# EAGLE board PCBwGND (EAGLE 9.2.0)
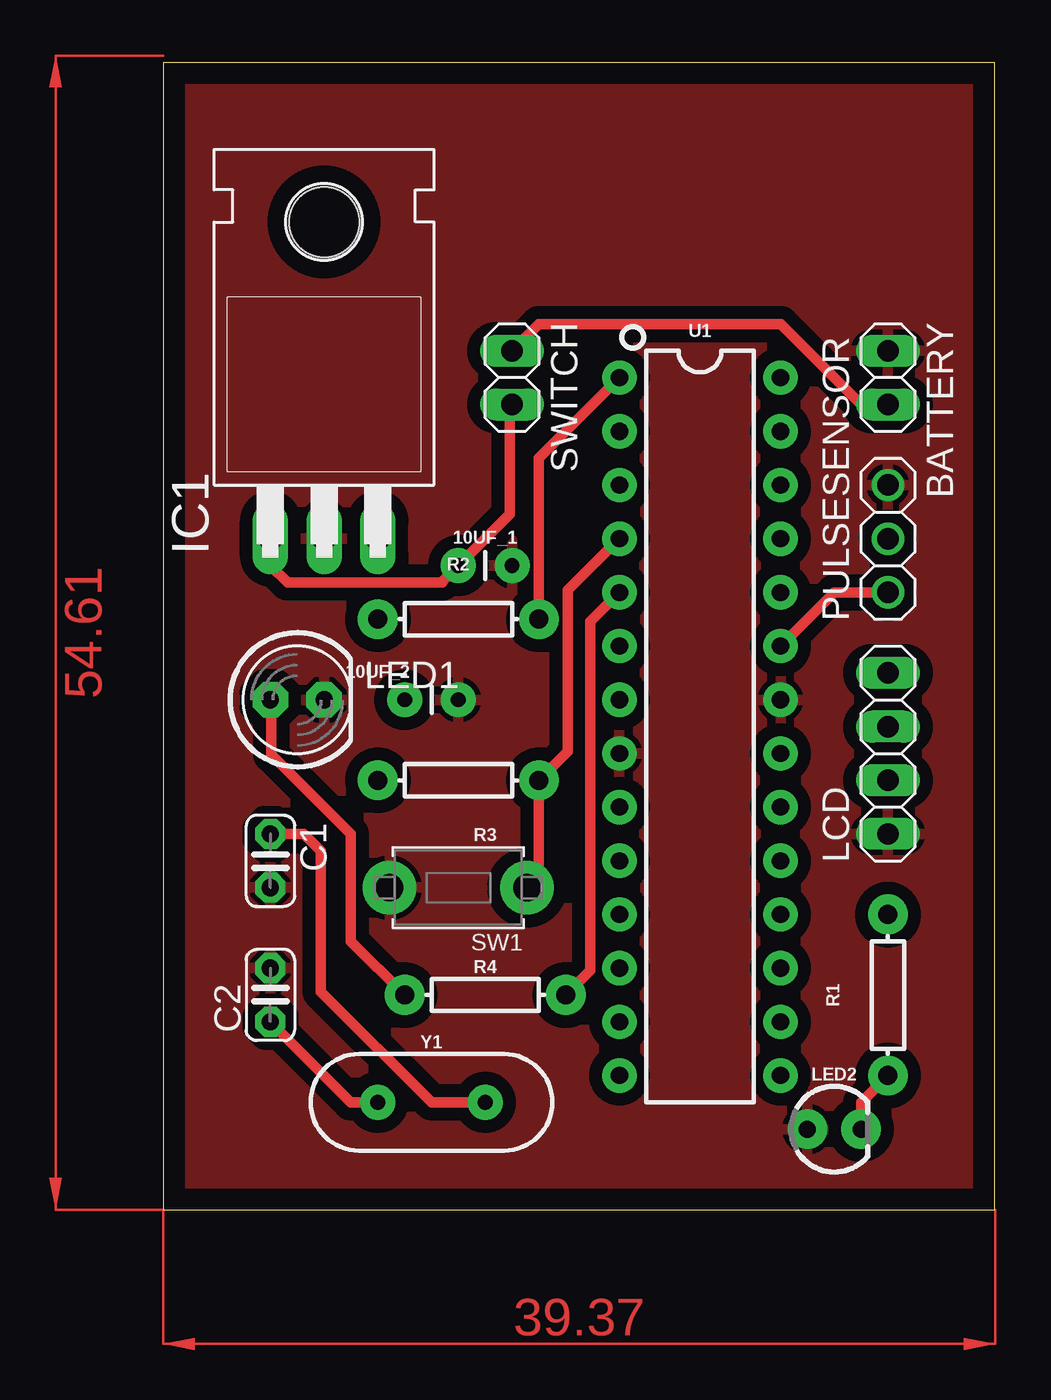
[diagram p0: board, top side]
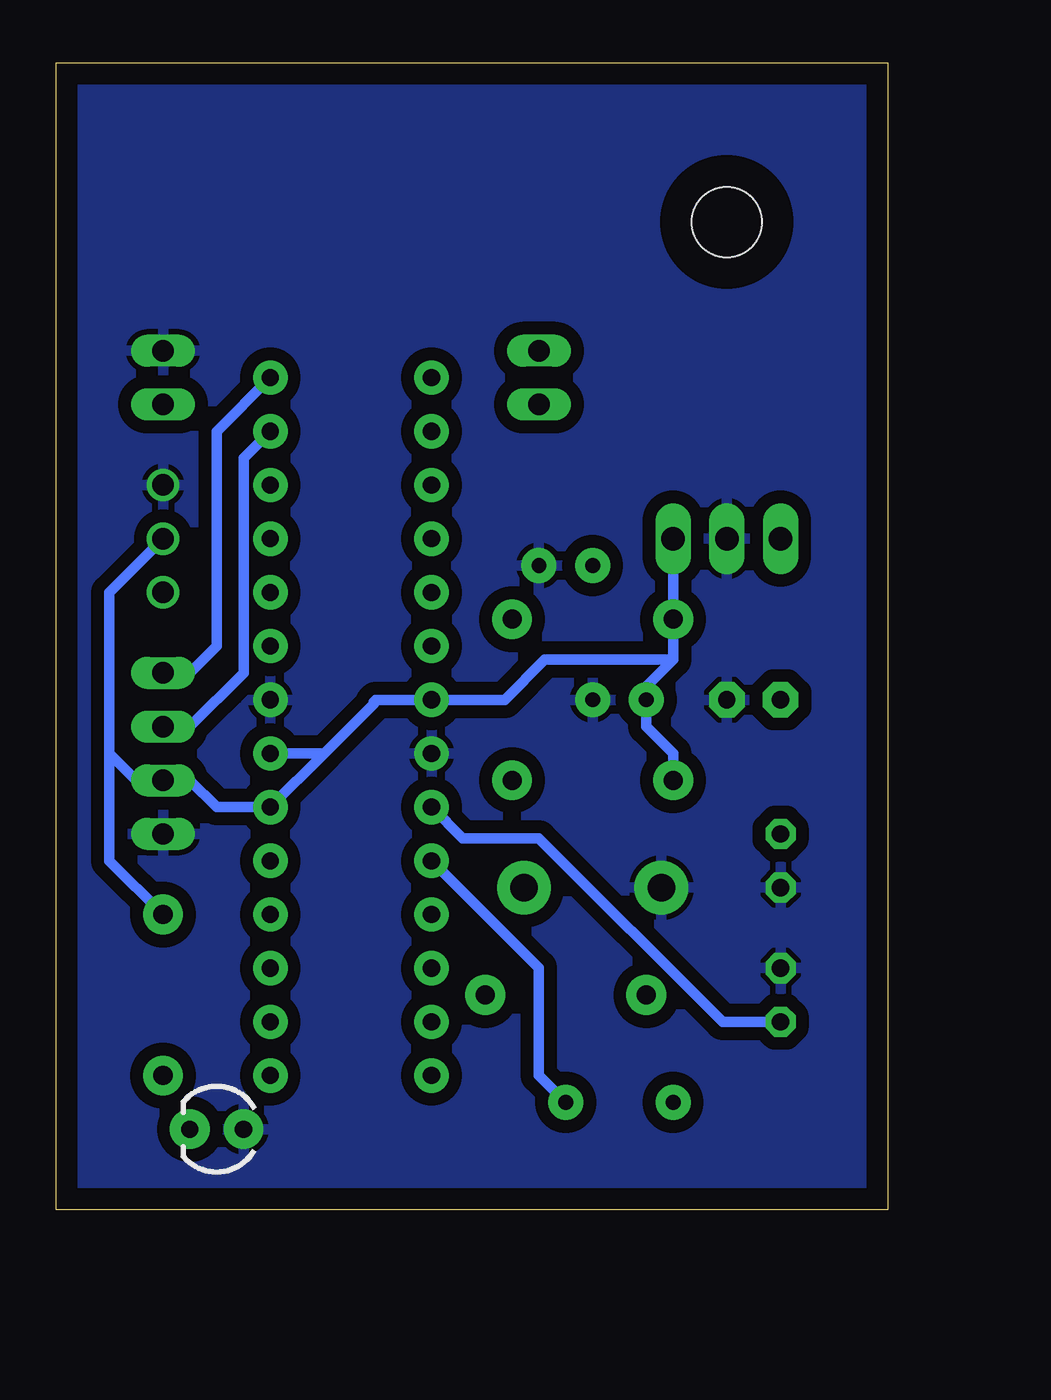
[diagram p1: board, bottom side, seen from below]

Size 39.35 x 54.28 mm. Coordinates in mm from the lower left corner, seen from the top.
Outline: 0,0 39.35,0 39.35,54.28 0,54.28 0,0
Copper layers (1*16): Top 0.035mm / dielectric 1.5mm / Bottom 0.035mm
Design rules "default": minimum track width 6mil, minimum drill 0.35mm, track to track 6mil, track to pad 6mil, pad to pad 6mil, via to via 6mil, smd to smd 6mil, copper to edge 40mil, drill to drill 6mil, minimum pad ring 10mil, minimum via ring 8mil, stop-mask expansion 4mil, vias tented up to drill 0mil, thermal gap 10mil

## Footprints (pad centres in the part's own frame; a part is rotated, then mirrored left to right if it is on the bottom)
CAP-PTH-2.54 = drill 0.7 pad 1.651: 1 -1.27,0; 2 1.27,0
1X02 = drill 1.016 long: 1 -1.27,0; 2 1.27,0
C025-024X044 = drill 0.813 pad 1.422 octagon: 1 -1.27,0; 2 1.27,0
TO220H = drill 1.118 long: 1 -2.54,-10.16; 2 0,-10.16; 3 2.54,-10.16 | hole 3.302: 0,4.826
1X04 = drill 1.016 long: 1 -3.81,0; 2 -1.27,0; 3 1.27,0; 4 3.81,0
LED5MM = drill 0.813 pad 1.676 octagon: A -1.27,0; K 1.27,0
LED_3MM = drill 0.813 pad 1.88: A -1.27,0; K 1.27,0
1X03 = drill 1.016: 1 -2.54,0; 2 0,0; 3 2.54,0
AXIAL-0.3 = drill 0.9 pad 1.88: P$1 -3.81,0; P$2 3.81,0
TACT_PANA-EVQ = drill 1.3 pad 2.54: P$1 -3.25,0; P$2 3.25,0
DIP28 = drill 0.813 pad 1.626: 1 -16.51,-3.81; 2 -13.97,-3.81; 3 -11.43,-3.81; 4 -8.89,-3.81; 5 -6.35,-3.81; 6 -3.81,-3.81; 7 -1.27,-3.81; 8 1.27,-3.81; 9 3.81,-3.81; 10 6.35,-3.81; 11 8.89,-3.81; 12 11.43,-3.81; 13 13.97,-3.81; 14 16.51,-3.81; 15 16.51,3.81; 16 13.97,3.81; 17 11.43,3.81; 18 8.89,3.81; 19 6.35,3.81; 20 3.81,3.81; 21 1.27,3.81; 22 -1.27,3.81; 23 -3.81,3.81; 24 -6.35,3.81; 25 -8.89,3.81; 26 -11.43,3.81; 27 -13.97,3.81; 28 -16.51,3.81
HC49US = drill 0.7 pad 1.651: 1 -2.54,0; 2 2.54,0

## Placement (x,y rotation side)
10UF_1  10uF  [CAP-PTH-2.54]  15.24,30.48 0 top
10UF_2  10uF  [CAP-PTH-2.54]  12.7,24.13 0 top
BATTERY  [1X02]  34.29,39.37 270 top
C1  22pF  [C025-024X044]  5.08,16.51 270 top
C2  22pF  [C025-024X044]  5.08,10.16 90 top
IC1  7805T  [TO220H]  7.62,41.91 0 top
LCD  [1X04]  34.29,21.59 90 top
LED1  [LED5MM]  6.35,24.13 0 top
LED2  [LED_3MM]  31.75,3.81 0 top
PULSESENSOR  [1X03]  34.29,31.75 90 top
R1  220  [AXIAL-0.3]  34.29,10.16 90 top
R2  10k  [AXIAL-0.3]  13.97,27.94 0 top
R3  10k  [AXIAL-0.3]  13.97,20.32 180 top
R4  150  [AXIAL-0.3]  15.24,10.16 0 top
SW1  [TACT_PANA-EVQ]  13.97,15.24 180 top
SWITCH  [1X02]  16.51,39.37 270 top
U1  328P  [DIP28]  25.4,22.86 270 top
Y1  16MHz  [HC49US]  12.7,5.08 0 top

## Library data of the parts
10UF_1 10UF_2 = SparkFun-Capacitors; PROD_ID: CAP-09128
BATTERY LCD SWITCH = pinhead
C1 C2 IC1 LED1 PULSESENSOR SW1 = adafruit
LED2 = SparkFun-LED; PROD_ID: DIO-08794
R1-R4 = SparkFun-Resistors; PROD_ID: RES-09435
U1 = SparkFun-IC-Microcontroller; PROD_ID: IC-09136
Y1 = SparkFun-Clocks; PROD_ID: XTAL-08181; SF_ID: COM-00536

## Nets
GND: 10UF_1.2 10UF_2.2 BATTERY.1 C1.2 C2.2 IC1.2 LCD.1 LED1.K LED2.A PULSESENSOR.3 SW1.P$2 U1.8 U1.22
N$1: BATTERY.2 SWITCH.1
N$3: LED1.A R4.P$1
N$4: LED2.K R1.P$1
PC0/ADC0: PULSESENSOR.1 U1.23
PD2: R4.P$2 U1.5
PD3: R3.P$1 SW1.P$1 U1.4
RESET: R2.P$2 U1.1
SCL: LCD.4 U1.28
SDA: LCD.3 U1.27
VCC: 10UF_2.1 IC1.3 LCD.2 PULSESENSOR.2 R1.P$2 R2.P$1 R3.P$2 U1.7 U1.20 U1.21
VIN: 10UF_1.1 IC1.1 SWITCH.2
XTAL1: C2.1 U1.9 Y1.1
XTAL2: C1.1 U1.10 Y1.2

## Tracks (layer width: path | path; a pad name or v marks a point on that pad's centre or on a via)
GND
  pour Bottom (isolate 0.61): 0,54.61 0,0 39.37,0 39.37,54.61
  pour Top (isolate 0.61): 0,54.61 0,0 39.37,0 39.37,54.61
N$1
  Top 0.508: SWITCH.1 17.78,41.91 29.21,41.91 33.02,38.1 BATTERY.2
N$3
  Top 0.508: R4.P$1 8.89,12.7 8.89,17.78 5.13,21.54 5.13,24.08 LED1.A
N$4
  Top 0.508: LED2.K 33.02,5.08 R1.P$1
PC0/ADC0
  Top 0.508: PULSESENSOR.1 31.75,29.21 U1.23
PD2
  Top 0.508: U1.5 20.22,27.84 20.22,11.33 R4.P$2
PD3
  Top 0.508: U1.4 19.15,29.31 19.15,21.69 R3.P$1 17.78,15.8 SW1.P$1
RESET
  Top 0.508: R2.P$2 17.78,35.56 U1.1
SCL
  Bottom 0.508: U1.28 31.75,36.83 31.75,26.67 33.02,25.4 LCD.4
SDA
  Bottom 0.508: U1.27 30.48,35.56 30.48,25.4 33.02,22.86 LCD.3
VCC
  Bottom 0.152: IC1.3 10.16,30.89 | 34.39,31.65 PULSESENSOR.2 | 34.39,13.97 R1.P$2
  Bottom 0.508: 10.16,26.04 11.43,24.77 10UF_2.1 11.43,22.86 10.16,21.59 R3.P$2 | 10.16,26.04 IC1.3 R2.P$1 | 10.16,26.04 16.23,26.04 18.14,24.13 U1.7 24.23,24.13 24.33,24.03 24.33,23.93 26.67,21.59 | 34.39,31.65 36.83,29.21 36.83,21.59 | 36.83,21.59 35.56,20.32 LCD.2 33.02,20.32 31.75,19.05 U1.20 26.67,21.59 | 36.83,21.59 36.83,16.51 R1.P$2 | U1.21 26.67,21.59
VIN
  Top 0.152: SWITCH.2 16.41,38.05
  Top 0.508: IC1.1 5.08,30.48 5.89,29.67 13.21,29.67 13.21,29.72 10UF_1.1 16.41,32.92 16.41,38.05
XTAL1
  Top 0.508: Y1.1 8.89,5.08 C2.1
  Bottom 0.508: C2.1 7.82,8.89 16.51,17.58 20.12,17.58 U1.9
XTAL2
  Top 0.508: Y1.2 12.7,5.08 7.47,10.31 7.47,16.97 6.66,17.78 C1.1
  Bottom 0.508: Y1.2 16.51,6.35 16.51,11.43 U1.10
(copper drawn outside any net)
  shapes: Top area x2